# Altium PCB OV5640_Module_Connect.PcbDoc
Units mil, origin at the board's own origin, x right, y up, seen from the top; angles counter-clockwise.
Board outline 435 x 625 mil, 2 copper layers (Top Layer, Bottom Layer); 20 components, 25 nets, 92 pads, 31 vias.
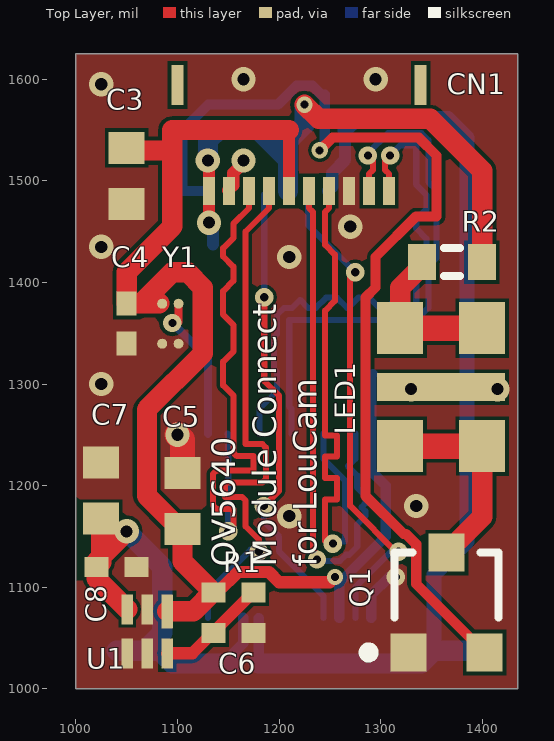
[diagram p0: Top Layer view]
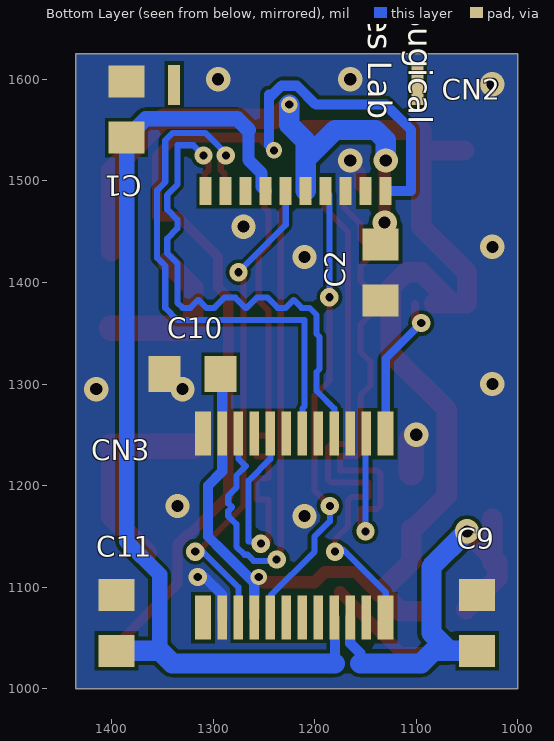
[diagram p1: Bottom Layer view, seen from below]

## Layer stack, top to bottom
Top Solder: solder mask 0.4, Solder Resist, Dk 3.5
Top Layer: signal copper 1.4
Dielectric 1: dielectric 12.6, FR-4, Dk 4.8
Bottom Layer: signal copper 1.4
Bottom Solder: solder mask 0.4, Solder Resist, Dk 3.5

## Board outline
1000,1000 1435,1000 1435,1625 1000,1625

## Design rules (kind name [scope] priority, off if disabled: settings)
Clearance [All] p1: gap=3.54
DiffPairsRouting [All] p1: maxlimit=10 minlimit=3.54 mostfreqgap=6 toplayer_minwidth=3.54 toplayer_maxwidth=15 toplayer_prefwidth=5 bottomlayer_minwidth=3.54 bottomlayer_maxwidth=15 bottomlayer_prefwidth=5 maxuncoupledlength=500
MatchedLengths MIPI [InNetClass('MIPI2')] p1: tolerance=10 checknetsindiffpair=TRUE checkdiffpairvsdiffpair=FALSE checkxsignals=FALSE checkothers=FALSE
PolygonConnect [All] p1: connectstyle=Direct reliefconductorwidth=10 reliefentries=4 polygonreliefangle="90 Angle" airgapwidth=10
RoutingVias [All] p1: holewidth=8 width=16 viastyle="Through Hole" minholewidth=5.91 minwidth=12 maxholewidth=28 maxwidth=50
SolderMaskExpansion [All] p1: expansion=4
Width [All] p1: maxlimit=100 minlimit=3.54 preferedwidth=5
29 further rules are at their usual default settings.

## Classes and differential pairs
net class MIPI2: MIPI_CLK_N MIPI_CLK_P MIPI_D0_N MIPI_D0_P MIPI_D1_N MIPI_D1_P
differential pair MIPI_D1: +MIPI_D1_P -MIPI_D1_N
differential pair MIPI_D0: +MIPI_D0_P -MIPI_D0_N
differential pair MIPI_CLK: +MIPI_CLK_P -MIPI_CLK_N

## Components (designator, comment, footprint, x,y, rotation, side; value= is the part's Value field where it differs from the comment)
C1 "4.7uF 16V" 1608[0603] 1385,1570 r90 bottom
C2 "4.7uF 16V" 1608[0603] 1135,1410 r90 bottom
C3 "4.7uF 16V" 1608[0603] 1050,1505 r270 top
C4 "0.01uF X7R" 0402 1050,1359.69 r270 top
C5 "4.7uF 16V" 1608[0603] 1105,1185 r90 top
C6 "0.1uF" 0402 1155,1055 r180 top
C7 "4.7uF 16V" 1608[0603] 1025,1195 r270 top
C8 "0.1uF" 0402 1040,1120 r180 top
C9 "4.7uF 16V" 1608[0603] 1040,1065 r270 bottom
C10 "4.7uF 16V" 1608[0603] 1320,1310 r0 bottom
C11 "4.7uF 16V" 1608[0603] 1395,1065 r90 bottom
CN1 "5034801000" 5034801000 1308.23,1490 r180 top
CN2 "5034801000" 5034801000 1130,1490 r0 bottom
CN3 "Header 12X2A" AXK724347G 1130,1070 r0 bottom
LED1 "MLBAWT-A1-0000-000WE5" "Cree ML-B LEB" 1400,1355 r270 top
Q1 "2N3904" SOT-23 1365,1085 r0 top
R1 "1K" 0402 1155,1095 r0 top
R2 "PHP00603E40R2BST1" J1-0603 1370,1420 r0 top
U1 "TLV70015DSER" TLV70015DSER 1090,1035 r180 top
Y1 "SIT8021AI-J4-18S-24.000000E" SIT8021AI-J4-18S-24.000000E 1085,1339.69 r90 top

## Footprints (in the part's own frame and the unit in brackets; to place one, negate y for a bottom-side part, rotate by r counter-clockwise, add the part's x,y. Pads: shape width x height; smd on the part's side, far side on the other; paste and mask are expansions set on the pad)
0402 [mm] "Chip Capacitor, Body 1.0x0.5mm, IPC High Density"
  rect 0.6x0.5 smd: 1(-0.5,0) 2(0.5,0)
  body extent -0.55,-0.3 0.55,0.3, height 1.3
1608[0603] [mm] "Chip Capacitor, Body 1.6x0.8mm, IPC High Density"
  rect 0.8x0.9 smd: 1(-0.7,0) 2(0.7,0)
  body extent -0.87,-0.48 0.87,0.48, height 1.3
5034801000 [mm]
  rect 0.3x0.7 smd: 1(0,0) 2(0.5,0) 3(1,0) 4(1.5,0) 5(2,0) 6(2.5,0) 7(3,0) 8(3.5,0) 9(4,0) 10(4.5,0)
  rect 0.3x1 smd: 11(-0.79,-2.65) 20(5.29,-2.65)
  body extent -1.15,-3.3 5.55,0.3, height 1.88
AXK724347G [mm]
  rect 0.4x1.1 smd: 1(4.57,0) 12(0,0) 13(0,-4.6) 24(4.57,-4.6)
  rect 0.23x1.1 smd: 2(4.085,0) 3(3.685,0) 4(3.285,0) 5(2.885,0) 6(2.485,0) 7(2.085,0) 8(1.685,0) 9(1.285,0) 10(0.885,0) 11(0.485,0) 14(0.485,-4.6) 15(0.885,-4.6) 16(1.285,-4.6) 17(1.685,-4.6) 18(2.085,-4.6) 19(2.485,-4.6) 20(2.885,-4.6) 21(3.285,-4.6) 22(3.685,-4.6) 23(4.085,-4.6)
  body extent -1.25,-4.85 5.85,0.25, height 2.42
"Cree ML-B LEB" [mm]
  rect 1.3x1.15 smd: 1(0,0) 1(0,-2.05) 2(2.95,0) 2(2.95,-2.05)
  rect 0.7x3.2 smd: 3(1.475,-1.025)
  body extent -0.26,-2.77 3.19,0.73, height 1.15
J1-0603 [mm] "Chip Resistor, Body 1.6x0.8mm, IPC High Density"
  rect 0.7x0.9 smd: 1(-0.75,0) 2(0.75,0)
  silkscreen extent -0.2,-0.35 0.2,0.35, body extent -0.85,-0.48 0.85,0.48, height 0.9
SIT8021AI-J4-18S-24.000000E [mm]
  round 0.25 smd: 1(0,-0.41) 2(1,-0.41) 3(1,0) 4(0,0)
SOT-23 [mm] "SOT-23; 3 Leads; Body 3.0 x 2.6 mm, inc. leads (LxW max)"
  rect 0.9x0.95 smd: 1(-0.95,-1.25) 2(0.95,-1.25) 3(0,1.25)
  silkscreen extent -2.07,-1.37 1.3,1.25
TLV70015DSER [mm]
  rect 0.28x0.85 smd: 1(0,-1.05)
  rect 0.28x0.75 smd: 2(0.5,-1.1) 3(1,-1.1) 4(1,0) 5(0.5,0) 6(0,0)

## Part data
C1 C2 C3 C4 C5 C6 C7 C8 C9 C10 C11: library part "Cap Semi", "Capacitor (Semiconductor SIM Model)"
CN1 CN2: library part "Header 10", "Header, 10-Pin"
CN3: "Header, 12-Pin, Dual row"
LED1: library part LED3, "Typical BLUE SiC LED"
Q1: "NPN General Purpose Amplifier"
R1 R2: library part Res3, "Resistor"
Y1: library part OSCILLATOR_2

## Via types
v1: diameter 24, hole 12, Top Layer to Bottom Layer, tented both sides, 16 vias
v2: diameter 18, hole 8, Top Layer to Bottom Layer, tented both sides, 12 vias
v3: diameter 16, hole 8, Top Layer to Bottom Layer, tented both sides, 3 vias

## Nets (pads, with @x,y where several pads share a name; then routed paths per layer and width w, separated by ;. In a path a pad name is that pad's centre, name@x,y a point inside that pad or via, vN(x,y) a via of type N, cw(c..) or ccw(c..) an arc to the next point about the centre after c; other vN are vias at no path point)
CAM_CLK: CN3.13 Y1.2 | length 147.9
  Top Layer w8: v2(1095,1360) 1100,1360 1101.14,1361.14 Y1.2
  Bottom Layer w8: v2(1095,1360) 1130,1325 CN3.13
CAM_I2C_SCL: CN2.4 CN3.5 | length 458
  Top Layer w6: v2(1185,1180) 1200,1195 1200,1288.46 1185.46,1303 v2(1185.46,1385.46)
  Bottom Layer w6: v2(1185,1180) 1185,1165 1200,1150 1200,1135 1243.58,1091.42 CN3.5 ; v2(1185.46,1385.46) 1185.46,1486.4 CN2.4
CAM_I2C_SDA: CN2.6 CN3.3 | length 488
  Top Layer w6: v2(1275,1410) 1270,1405 1270,1180 1317.5,1132.5 v2(1317.5,1135)
  Bottom Layer w6: CN2.6 1228.43,1456.57 v2(1275,1410) ; CN3.3 1275.08,1100.08 1310,1135 v2(1317.5,1135)
CLKM_CX3: CN2.8
CX3_GPIO20: CN2.2
CX3_GPIO25: CN2.1 Q1.2 | length 1012.6
  Top Layer w10: v3(1240,1530) 1252.56,1542.56 1337.44,1542.56 1355,1525 1355,1465 1335,1465 1295,1425 1295,1395 1285,1385 1285,1190 1322.46,1152.54 1324.77,1152.54 1335.04,1142.27 1335.04,1103.15 Q1.2
  Bottom Layer w10: CN2.1 1105,1490 1105,1550 1130,1575 1198.78,1575 1217.32,1593.54 1232.68,1593.54 1243.11,1583.11 1245,1585 1245,1535 v3(1240,1530)
GND: C1.2 C2.1 C3.2 C4.2 C5.2 C6.1 C7.1 C8.1 C9.1 C10.2 C11.2 CN1.3 CN1.9 CN2.3 CN3.2 CN3.15 CN3.24 LED1.3 Q1.1 U1.2 U1.4 U1.5 Y1.1 Y1.4 | length 130
  Top Layer w12: CN1.9 1150,1490.75 1154.98,1495.73 1154.98,1507.73 1165,1517.75 v1(1165,1520)
  Top Layer w25: v1(1100,1250) 1105,1245 C5.2
  Bottom Layer w10: CN3.2 1290.83,1092.52 1308.31,1110 v2(1315,1110)
  other v1: 1210,1170 1335,1180 1330,1295 1415,1295 1025,1300 1210,1425 1025,1435 1270,1455 1025,1595 1165,1600 1295,1600
MIPI_CAM_PWDN: CN2.9
MIPI_CAM_RST: CN2.10
MIPI_CLK_N: CN1.2 CN3.18 | length 537.8
  Top Layer w6: v2(1287.38,1525) 1292.38,1520 1292.38,1510.62 1288.54,1506.78 CN1.2
  Bottom Layer w6: CN3.18 1212.09,1275.76 1210,1277.84 1210,1363 1334.97,1363 1347,1375.03 1347,1416.26 1355,1424.26 1355,1490.74 1347,1498.74 1347,1539.97 1339.97,1547 1307.34,1547 1287.38,1527.04 v2(1287.38,1525)
MIPI_CLK_P: CN1.1 CN3.16 | length 538
  Top Layer w6: CN1.1 1308.23,1506.78 1304.38,1510.62 1304.38,1520 v2(1309.38,1525)
  Bottom Layer w6: CN3.16 1180.59,1275.76 1198,1293.17 1198,1311.87 1195,1314.87 1195,1346.27 1198,1349.27 1198,1367.97 1205.03,1375 1212.84,1375 1220.65,1382.81 1228.46,1375 1236.27,1375 1246.27,1385 1256.89,1385 1266.89,1375 1268.14,1375 1278.14,1385 1288.76,1385 1298.76,1375 1306.57,1375 1314.38,1382.81 1322.19,1375 1330,1375 1335,1380 1335,1418.75 1345,1428.75 1345,1443.12 1335,1453.12 1335,1461.88 1345,1471.88 1345,1486.25 1335,1496.25 1335,1535 1319.38,1535 v2(1309.38,1525)
MIPI_D0_N: CN1.5 CN3.22 | length 539.6
  Top Layer w6: CN1.5 1229.49,1473.22 1233.33,1469.38 1233.33,1136.67 1237.39,1132.61 v2(1237.39,1127.39)
  Bottom Layer w6: v2(1237.39,1127.39) 1238.83,1125.94 1259.98,1125.94 1266.02,1131.98 1268.95,1131.98 1277,1140.03 1277,1162 1285,1170 1285,1175 1281.25,1178.75 1285,1182.5 1285,1190 1277,1198 1277,1210 1267.82,1219.19 1275.08,1226.45 CN3.22
MIPI_D0_P: CN1.4 CN3.20 | length 537.6
  Top Layer w6: CN1.4 1249.17,1473.22 1245.33,1469.38 1245.33,1437.03 1255,1427.36 1255,1382.02 1245.33,1372.34 1245.33,1340 1245.33,1249.5 1257.04,1249.5 1257.04,1228.5 1245.33,1228.5 1245.33,1207.5 1257.04,1207.5 1257.04,1186.5 1245.33,1186.5 1245.33,1165.5 1245.33,1155 1245.33,1145.33 1247.71,1142.94 v2(1252.94,1142.94)
  Bottom Layer w6: CN3.20 1243.58,1226.45 1265,1205.03 1265,1145 1255,1145 v2(1252.94,1142.94)
MIPI_D1_N: CN1.8 CN3.14 | length 538.6
  Top Layer w6: v2(1150,1155) 1155,1160 1155,1177 1138.51,1177 1135,1180.51 1135,1211.49 1138.51,1215 1175,1215 1175,1229 1158.51,1229 1155,1232.51 1155,1288.83 1145,1298.83 1145,1321.99 1155,1331.99 1155,1358.31 1145,1368.31 1145,1391.47 1155,1401.47 1155,1415.55 1145,1425.55 1145,1433.71 1155,1443.71 1155,1457.79 1170.43,1473.22 CN1.8
  Bottom Layer w6: CN3.14 1150,1250.2 v2(1150,1155)
MIPI_D1_P: CN1.7 CN3.12 | length 537
  Top Layer w6: v2(1180,1135) 1180,1147 1167,1160 1167,1185.49 1163.49,1189 1147,1189 1147,1203 1183.49,1203 1187,1206.51 1187,1237.49 1183.49,1241 1167,1241 1167,1450.11 1190.12,1473.22 CN1.7
  Bottom Layer w6: CN3.12 1130,1095 1172,1137 1174,1135 v2(1180,1135)
NetC6_2: C6.2 R1.2 U1.6 | length 109.5
  Top Layer w12: U1.6 1114.68,1035 R1.2
NetLED1_1: LED1.1 R2.1 | length 156.1
  Top Layer w20: LED1.1@1319.29,1355 1319.29,1394.88 R2.1@1344.41,1420
  Top Layer w25: LED1.1@1319.29,1355 LED1.1@1400,1355
NetLED1_2: LED1.2 Q1.3 | length 199.9
  Top Layer w20: Q1.3 1400,1169.21 LED1.2@1400,1238.86
  Top Layer w25: LED1.2@1319.29,1238.86 LED1.2@1400,1238.86
PWDN: CN3.8
RESET: CN3.6
STROBE: CN3.1
VCC_1V5: C7.2 C8.2 C9.2 CN3.10 U1.3 | length 459.5
  Top Layer w20: C7.2 1025,1130 ; v1(1050,1155) 1025,1130 ; U1.3 1020.31,1108.62 C8.2 ; C8.2 1025,1124.69 1025,1130 ; C8.2 1020.31,1125.31 1025,1130
  Bottom Layer w10: 1155,1025 1155,1035 1164.84,1044.84 CN3.10
  Bottom Layer w20: C9.2 1067.44,1037.44 ; v1(1050,1155) 1085,1120 1085,1055 1067.44,1037.44 ; 1155,1025 1095,1025 1082.56,1037.44 1067.44,1037.44
VCC_1V8: C1.1 C11.1 CN2.7 CN3.9 | length 982.3
  Bottom Layer w10: 1180,1025 CN3.9@1180,1069.41
  Bottom Layer w12: CN2.7 1252.35,1494.24 1252.35,1507.73 1265,1520.39 1265,1550
  Bottom Layer w15: 1265,1550 1276.04,1561.04 1366.4,1561.04 C1.1 1385,1145 1352.44,1112.44 1352.44,1037.44
  Bottom Layer w20: 1180,1025 1340,1025 1352.44,1037.44 C11.1
VCC_2V8: C3.1 C4.1 C5.1 C10.1 CN1.6 CN3.4 CN3.23 R1.1 U1.1 Y1.3 | length 1320.5
  Top Layer w12: R1.1 1139.54,1095 1159.54,1115 1190,1115 1200,1105 1250,1105 v3(1255,1110) ; CN1.6 1209.8,1550
  Top Layer w20: C3.1@1052.76,1529.8 1095,1529.8 ; Y1.3@1082.36,1379.37 1064.37,1379.37 ; U1.1 1115.85,1076.34 1134.51,1095 R1.1 1105,1125.32 C5.1 ; C5.1@1103.78,1156.22 1070,1190 1070,1275 1125,1330 1125,1395 1110,1410 1095,1410 1064.37,1379.37 ; 1209.8,1550 1095,1550 1095,1455 1050,1410 C4.1 1064.37,1379.37
  Bottom Layer w10: CN3.4 v3@1259.33,1104.33 ; v3@1260,1105 1290,1135 1305,1150 1305,1200 1290.83,1214.17 CN3.23 1290.83,1308.39 C10.1
VCC_3V3: C2.2 CN1.10 CN2.5 R2.2 | length 570.9
  Top Layer w12: v1(1131.06,1458.94) CN1.10 v1@1131.06,1518.94
  Top Layer w20: v3(1225,1575) 1238.9,1561.1 1348.9,1561.1 1400,1510 R2.2@1400,1430.59
  Bottom Layer w12: v1(1131.06,1458.94) 1135,1455 C2.2
  Bottom Layer w20: v1(1130,1520) 1130,1540 1140,1550 1180,1550 1208.74,1521.26 ; CN2.5 1208.74,1521.26 ; v3(1225,1575) 1225,1555 1208.74,1538.74 1208.74,1521.26
pads on no net: CN1.11 CN1.20 CN2.11 CN2.20 CN3.7 CN3.11 CN3.17 CN3.19 CN3.21

## Polygon pours and split planes (outlines as drawn)
GND on Top Layer "GND" (solid, pour order 0): 1000,1625 1435,1625 1435,1000 1000,1000
GND on Bottom Layer "GND" (solid, pour order 2): 1000,1625 1435,1625 1435,1000 1000,1000

## Silkscreen, mask and mechanical layers (free items; w line width, h text height)
Top Overlay:
  text "OV5640  / Module Connect / for LouCam" at 1245,1120 h40 r90
Bottom Overlay:
  text "Advanced Sugical / Technologies Lab" at 1155,1840 h40 r90
  text "UNL" at 1760,1310 h80
Mechanical 13:
  the board outline again, w10